# Altium PCB front_flex.PcbDoc (part 2 of 2)
Units mil, origin at the board's own origin, x right, y up, seen from the top; angles counter-clockwise.
Board outline 5591.04 x 1020.3 mil, 4 copper layers (Layer 1 (Top Layer), Layer 2 (PWR), Layer 3 (GND), Layer 4 (Bottom Layer)), stack 21.036 mil thick; 26 components, 44 nets, 150 pads, 87 vias.
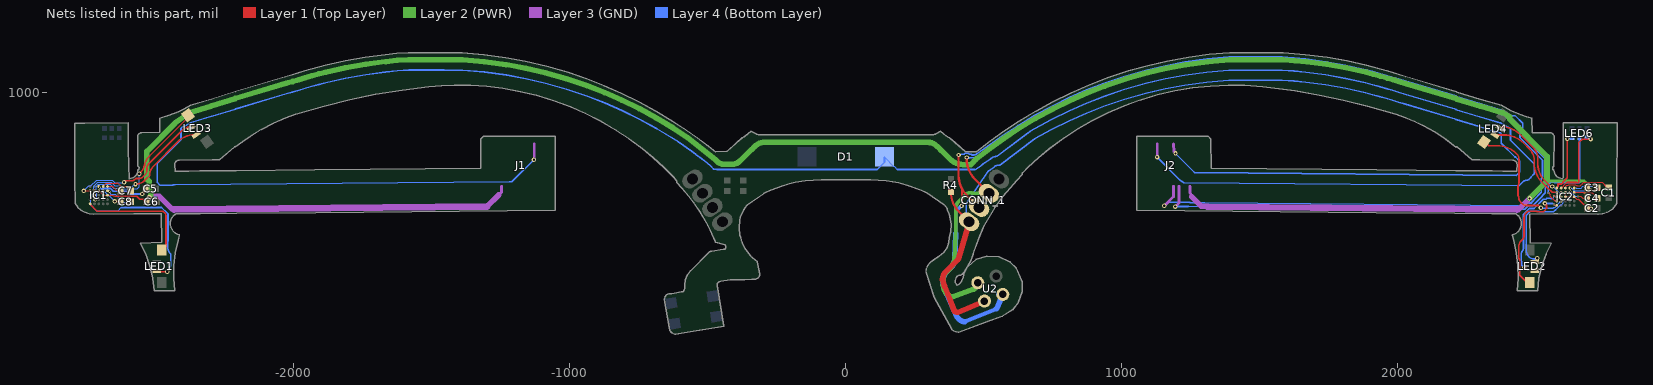
[diagram p4: the nets of this part, all layers, seen from the top]

## Via types
v1: diameter 16, hole 8, Layer 1 (Top Layer) to Layer 4 (Bottom Layer), tented both sides, 43 vias
v2: diameter 8, hole 4, Layer 1 (Top Layer) to Layer 4 (Bottom Layer), tented both sides, 19 vias
v3: diameter 16, hole 8, Layer 3 (GND) to Layer 4 (Bottom Layer), tented both sides, 17 vias
v4: diameter 24, hole 12, Layer 1 (Top Layer) to Layer 4 (Bottom Layer), tented both sides, 3 vias
v5: diameter 20, hole 10, Layer 1 (Top Layer) to Layer 4 (Bottom Layer), tented both sides, 2 vias
v6: diameter 18, hole 8, Layer 1 (Top Layer) to Layer 4 (Bottom Layer), tented both sides, 1 vias
v7: diameter 12, hole 6, Layer 1 (Top Layer) to Layer 4 (Bottom Layer), tented both sides, 1 vias
v8: diameter 24, hole 12, Layer 3 (GND) to Layer 4 (Bottom Layer), tented both sides, 1 vias

## Nets (pads, with @x,y where several pads share a name; then routed paths per layer and width w, separated by ;. In a path a pad name is that pad's centre, name@x,y a point inside that pad or via, vN(x,y) a via of type N, cw(c..) or ccw(c..) an arc to the next point about the centre after c; other vN are vias at no path point) (continued)
LED_LEFT_SIDE_G: IC1.C2 LED1.3 | length 593.7
  Layer 1 (Top Layer) w6: LED1.3@-2493.64,351.14 -2493.49,351.29 v1(-2458.5,351.29)
  Layer 4 (Bottom Layer) w4: v2(-2725.33,626.06) -2727.3,626.06 -2736.83,616.52 -2736.83,594.35 -2715.78,573.3 -2637.09,573.3 -2626.09,584.3
  Layer 4 (Bottom Layer) w6: -2626.09,584.3 -2479.49,584.3 -2461.09,565.89 -2461.09,565.68 -2456.36,560.95 -2456.36,462.57 ; v1(-2458.5,351.29) -2458.2,351.29 -2450.65,358.84 -2450.65,364.12 ccw(c-2452.71,364.12) -2451.26,365.58 ; -2456.99,462.48 -2456.99,440.91 ccw(c-2420.89,440.91) -2446.42,415.39 -2446.42,372.26 -2452.09,366.59
LED_LEFT_SIDE_R: IC1.E1 LED1.1 | length 426.4
  Layer 1 (Top Layer) w4: LED1.1@-2475.93,425.94 LED1.1@-2463.79,438.07
  Layer 1 (Top Layer) w6: IC1.E1@-2738.33,597.3 -2738.33,595.33 -2713.3,570.3 -2479.69,570.3 cw(c-2479.69,553.94) -2468.12,565.51 cw(c-2480.28,553.35) -2463.09,553.35 LED1.1@-2463.09,441.49
LED_LEFT_TOP_B: IC1.B1 LED3.4 | length 530.4
  Layer 1 (Top Layer) w4: v1@-2759.84,644.55 IC1.B1@-2738.33,644.56
  Layer 1 (Top Layer) w6: v1(-2761.09,644.3) -2760.09,644.3 v1@-2759.84,644.55 ; v1@-2615.3,674.53 -2615.53,674.3 -2615.99,674.3 -2608.69,681.59 -2583.23,681.59 -2580.82,684 -2578.86,684 -2573.56,689.3 -2561.12,689.3 ccw(c-2561.12,708.24) -2547.73,694.84 -2539.43,703.15 ccw(c-2556.66,720.38) -2532.29,720.38 -2532.29,723.78 ; -2532.84,723.78 cw(c-2502.72,723.78) -2524.02,745.08 -2406.68,862.42 cw(c-2369.72,825.46) LED3.4@-2369.72,877.73
  Layer 4 (Bottom Layer) w4: v1(-2761.09,644.3) -2742.92,662.47 -2735.95,662.47 -2714.86,683.56 -2659.01,683.56 -2649.75,674.3 v1@-2615.3,674.3
  other v1: -2615.3,675.83
LED_LEFT_TOP_G: IC1.B2 LED3.3 | length 466.4
  Layer 1 (Top Layer) w6: v1(-2574,669) ccw(c-2574,716.7) -2540.27,682.97 -2522.84,700.4 cw(c-2475.06,700.4) -2508.87,734.16 -2420.33,822.71 cw(c-2358.95,761.34) LED3.3@-2358.95,848.13
  Layer 4 (Bottom Layer) w4: v2(-2725.33,647.3) -2725.33,661.78 -2711.55,675.56 -2662.33,675.56 -2649.56,662.8 -2629.36,662.8 -2627.1,660.53 -2585.07,660.53 v1@-2580.3,665.3
LED_LEFT_TOP_R: IC1.D2 LED3.1 | length 567
  Layer 1 (Top Layer) w4: v1@-2563.05,703.59 v1(-2560.3,706.3)
  Layer 1 (Top Layer) w6: v1(-2560.3,706.3) -2554.28,712.37 ccw(c-2586.69,744.77) -2540.85,744.77 cw(c-2462.6,710.62) -2522.98,770.99 -2370.61,923.36 cw(c-2367.89,920.64) LED3.1@-2367.89,924.48
  Layer 4 (Bottom Layer) w4: v2(-2719.84,610.32) -2714.43,615.73 -2714.43,633.5 -2716.09,635.15 -2716.09,642.4 -2715.33,643.16 -2715.33,651.44 -2716.09,652.2 -2716.09,659.7 -2708.23,667.56 -2665.64,667.56 -2652.88,654.8 -2632.68,654.8 -2630.41,652.53 -2567.2,652.53 -2560,659.73 -2560,702.47 v1@-2560.22,702.69
  Layer 4 (Bottom Layer) w10: v1(-2560.3,706.3) -2560.3,704.62 ccw(c-2538.63,704.62) v1@-2560.22,702.69
LED_RIGHT_FRONT_B: IC2.A1 LED6.3 | length 220.4
  Layer 1 (Top Layer) w6: IC2.A1@2577.14,654.79 2577.12,654.92 2581.7,659.49 2581.7,669.52 2594.86,669.52 2601.11,675.77 2601.11,677.19 2615.48,691.56 v1(2615.48,833.36)
  Layer 4 (Bottom Layer) w6: v1(2615.48,833.36) 2630.56,833.36 ccw(c2630.56,837.33) LED6.3@2633.37,834.52
LED_RIGHT_FRONT_G: IC2.A2 LED6.1 | length 270.4
  Layer 1 (Top Layer) w4: IC2.A2@2592.89,654.79 2611.11,673.04
  Layer 1 (Top Layer) w6: 2611.11,673.04 2612.86,674.79 2648.42,674.79 2649.16,674.05 2656.62,674.05 2656.62,819.59 2669,831.97 v1(2699.81,831.97)
  Layer 4 (Bottom Layer) w4: v1@2695.58,831.97 v1(2699.81,831.97)
LED_RIGHT_FRONT_R: IC2.D1 LED6.2 | length 355.9
  Layer 1 (Top Layer) w4: v2(2547.62,636.31) 2553.49,630.44 2553.49,625.24 2569.92,608.81 2574.16,608.81 cw(c2574.16,606.78) IC2.D1@2575.6,608.21
  Layer 4 (Bottom Layer) w6: v2(2547.62,636.31) 2545.95,637.98 2545.95,666.55 2554.74,675.33 2567.16,675.33 2568.99,673.51 2659.5,673.51 2659.5,807.23 2659.39,807.35 2659.39,830.5 cw(c2660.97,830.5) LED6.2@2659.41,830.76 ; LED6.2@2659.41,836.93 LED6.2@2659.41,830.76 ; LED6.2@2659.85,831.62 ccw(c2660.97,830.5) LED6.2@2659.41,830.76
LED_RIGHT_SIDE_B: IC2.C1 LED2.4 | length 392.7
  Layer 1 (Top Layer) w4: v2(2566.62,626.31) 2566.89,626.04 2573.76,626.04 2576.49,623.31 IC2.C1@2577.12,623.31
  Layer 1 (Top Layer) w6: v1(2458.21,366.86) 2459.8,366.86 2461.94,368.99 2472.36,358.57 2486.47,358.57 LED2.4@2491.47,353.57
  Layer 4 (Bottom Layer) w4: 2560.87,615.57 2565.37,620.06 2565.37,625.06 v2(2566.62,626.31)
  Layer 4 (Bottom Layer) w6: v1(2458.21,366.86) 2449.72,375.36 2449.72,388.19 2449.01,388.9 2449.01,418.26 cw(c2462.07,418.26) 2452.83,427.49 ccw(c2443.69,436.64) 2456.62,436.64 2456.62,559.54 2477.39,580.31 2494.36,580.31 2527.97,613.92 2538.01,613.92 2541.25,617.16 2554.5,617.16 2556.09,615.57 2560.87,615.57
LED_RIGHT_SIDE_G: IC2.C2 LED2.3 | length 361.7
  Layer 4 (Bottom Layer) w4: 2572.87,575.81 2572.87,576.19 2591.48,594.8 2594.29,594.8 2600.15,600.66 2600.15,604.8 ccw(c2590.15,604.8) 2597.22,611.87 2595.76,613.34 ccw(c2592.22,609.8) 2592.22,614.8 2591.77,614.8 2588.37,618.2 2588.37,618.98 v2@2589.95,620.55
  Layer 4 (Bottom Layer) w6: 2466.47,427.84 ccw(c2496.87,427.84) 2466.62,424.86 ; v1@2499.66,397.58 cw(c2496.87,427.84) 2466.62,424.86 ; 2572.87,575.81 2565.41,568.34 2513.45,568.34 2511.49,570.31 2481.54,570.31 2466.62,555.39 2466.62,424.86 ; v2@2589.95,620.55 v2(2590.15,620.55)
  other v1: 2506.47,400.36
LED_RIGHT_SIDE_R: IC2.E1 LED2.1 | length 427.5
  Layer 1 (Top Layer) w4: v1(2534.18,598.92) v1@2536.94,596.16 ; v2(2566.7,595.48) 2569.53,592.64 2576.29,592.64 IC2.E1@2577.12,591.81
  Layer 1 (Top Layer) w6: LED2.1@2473.75,312.23 2473.75,310.26 cw(c2473.75,315.97) 2469.72,311.93 2444.68,336.97 cw(c2448.72,341.01) 2443.01,341.01 2442.62,363.38 2442.62,391.94 ccw(c2431.46,391.94) 2439.57,399.61 2439.35,441.79 cw(c2471.06,441.79) 2448.64,464.22 2453.64,469.22 ccw(c2441.62,481.24) 2458.62,481.24 2458.62,548.93 cw(c2479.42,548.93) 2464.71,563.63 2467.64,566.56 cw(c2476.68,557.52) 2476.68,570.31 2504.76,570.31 2506.73,568.34 2528.2,568.34 2529.48,569.62 2541.93,582.07 2539.7,584.29 2539.7,593.4 v1@2536.94,596.16
  Layer 4 (Bottom Layer) w6: v1@2535.79,598.92 2562.72,598.92 2566.16,595.48 v2(2566.7,595.48)
LED_RIGHT_TOP_B: IC2.B1 LED4.4 | length 338.7
  Layer 1 (Top Layer) w4: IC2.B1@2576.29,639.89 IC2.B1@2577.14,639.04
  Layer 1 (Top Layer) w6: LED4.4@2357.5,847.14 2386.15,847.14 cw(c2386.15,747.14) 2456.86,817.85 2477.78,796.93 cw(c2435.03,754.18) 2495.49,754.18 2495.49,745.3 ccw(c2595.49,745.3) 2524.78,674.59 2544.87,654.49 2545.58,654.49 2560.18,639.89 IC2.B1@2576.29,639.89
LED_RIGHT_TOP_G: IC2.B2 LED4.3 | length 359.6
  Layer 1 (Top Layer) w6: LED4.3@2368.27,876.73 2374.95,876.73 cw(c2374.95,776.73) 2445.67,847.44 2460.74,832.37 2493.26,799.85 cw(c2455.72,762.36) 2508.77,762.36 2508.77,741.71 ccw(c2593.4,741.71) 2533.56,681.87 2547.09,668.34 cw(c2545.8,667.06) 2547.62,667.06 2554.35,660.33 v1(2560.95,660.33)
  Layer 4 (Bottom Layer) w4: v1(2560.95,660.33) 2563.1,660.33 2587.14,636.29 v2(2590.14,636.29) ; v2@2588.37,634.56 v2(2590.14,636.29)
LED_RIGHT_TOP_R: IC2.D2 LED4.1 | length 476.6
  Layer 1 (Top Layer) w4: v2(2590.15,604.8) 2590.15,605.83 2591.88,607.56 IC2.D2@2594.05,607.56
  Layer 1 (Top Layer) w6: LED4.1@2316.58,808.49 2319.26,811.17 2327.37,811.17 2330.09,808.45 2360.44,808.45 cw(c2360.44,708.45) 2431.16,779.17 2432.13,778.2 cw(c2412.97,759.04) 2440.06,759.04 2440.06,672.71 cw(c2428.76,672.71) 2436.75,664.72 ; 2436.8,664.15 2436.75,664.11 2436.75,658.99 2436.75,653.87 2436.75,627.59 ccw(c2443.49,627.59) 2438.72,622.82 ccw(c2467.97,622.82) 2447.29,602.15 2448.83,600.61 ccw(c2471.36,623.14) 2471.36,591.27 2511.15,591.27 2519.09,583.34 v1(2519.67,583.34)
  Layer 4 (Bottom Layer) w4: 2568.12,583.81 2569.79,585.48 2570.84,585.48 v2(2590.15,604.8)
  Layer 4 (Bottom Layer) w6: v1@2512.96,583.4 2515.05,581.31 2563.37,581.31 2565.37,583.31
LH_DIODE_ARRAY: D1.1 J1.14 J2.13 | length 8456.1
  Layer 3 (GND) w10: v3(-1129.82,757.59) -1128.83,758.58 J1.14@-1128.83,814.72 ; v3(1128.78,766.97) v3(1128.78,766.97) J2.13@1128.82,814.72
  Layer 4 (Bottom Layer) w4: D1.1@140.75,767.67 140.75,766.68 173.2,734.23 175.14,734.23 187.76,721.61
  Layer 4 (Bottom Layer) w6: -2297.73,914.37 -2298.01,914.29 -2375.27,891.33 -2393.36,880.85 -2404.52,875.15 -2409.09,870.59 -2409.09,829.5 -2494.88,743.71 -2494.88,675.31 -2489.03,669.46 -2484.87,665.3 -2471.45,665.3 -2470.77,664.61 -2438.9,664.61 -2437.39,666.12 -2429.34,666.12 -1219.46,677.21 -1210.2,677.21 v3(-1129.82,757.59) ; -2296.29,914.47 -2212.03,939.84 -2212.05,941.31 -2027.38,995.99 -2004.16,1002.86 -1981.48,1009.58 -1958.79,1016.3 -1934.04,1023.43 -1909.34,1030.15 -1884.54,1036.49 -1812.46,1052.67 -1739.75,1065.65 -1667.03,1075.33 -1624.87,1079.45 -1582.61,1082.47 -1520.87,1082.42 -1454.76,1082.33 -1388.64,1082.2 -1308.84,1075.29 -1229.5,1064.41 -1158.68,1051.25 -1088.65,1034.93 -1011.52,1013.06 -935.43,987.32 -872.62,962.82 -810.87,935.68 -747.3,904.45 -685.15,870.5 -624.51,833.9 -606.54,822.34 -557.94,787.64 -543.31,777.18 ; -542.1,775.97 -528.83,765.98 -502.71,746.45 -487.99,733.43 -479.05,723.73 -466.57,721.83 113.94,721.83 140.75,748.63 D1.1@140.75,766.68 ; 187.76,721.61 468.24,721.61 488.1,734.15 498.32,742.03 521.39,756.89 523.73,759.23 cw(c548.44,734.53) 548.44,769.46 632.61,833.1 654.16,849.06 661.7,854.66 667.81,859.74 684.89,869.72 747.04,903.68 810.61,934.91 872.36,962.04 935.17,986.55 1011.26,1012.28 1088.39,1034.16 1158.42,1050.47 1229.24,1063.63 1308.58,1074.51 1388.38,1081.42 1454.5,1081.56 1520.61,1081.64 1582.35,1081.69 1624.61,1078.67 1666.77,1074.56 1739.49,1064.88 1812.2,1051.89 1884.28,1035.71 1909.08,1029.37 1933.78,1022.66 1958.53,1015.53 1981.22,1008.81 2003.91,1002.08 2027.12,995.21 2211.79,940.53 2211.77,939.06 2296.03,913.69 ; v3(1128.78,766.97) 1128.78,766.06 1212.6,682.24 1225.25,673.65 2434.59,662.56 ; 2296.26,913.39 2296.55,913.3 2373.8,890.34 ; 2375.8,889.34 2393.89,878.86 2405.06,873.16 2409.62,868.6 2409.62,827.52 2495.38,741.76 2495.38,706.16 2484.04,694.83 cw(c2478.31,696.59) 2482.52,692.32 2477.58,687.37 cw(c2465.39,699.59) 2465.39,682.33 ccw(c2465.39,668.63) 2455.7,678.32 2443.72,666.34 cw(c2434.59,675.48) 2434.85,662.56 ; 2434.59,662.56 ccw(c2434.59,675.48) 2434.85,662.56 ; 2434.59,662.56 2434.85,662.56
NetC3_1: C3.1 IC2.A5 | length 84.6
  Layer 1 (Top Layer) w4: v2@2713.51,660.9 2720.15,660.9 C3.1@2724.88,656.17
  Layer 4 (Bottom Layer) w4: v2(2644.86,654.52) 2665.68,654.52 2672.05,660.9 v2(2710.51,660.9) v2@2713.51,660.9
NetC3_2: C3.2 IC2.A4 | length 95.2
  Layer 1 (Top Layer) w4: C3.2@2687.08,656.17 2694.83,648.42 v2(2700.37,648.42)
  Layer 4 (Bottom Layer) w4: v2(2627.13,653.79) 2630.54,653.79 2639.87,644.46 2680.77,644.46 2684.73,648.42 v2(2700.37,648.42)
NetC4_1: C4.1 IC2.B5 | length 93
  Layer 1 (Top Layer) w4: IC2.B5@2640.13,639.04 2673.06,639.06 2673.76,638.35 2705.69,638.35 C4.1@2724.88,619.17
NetC4_2: C4.2 IC2.B4 | length 70.9
  Layer 1 (Top Layer) w4: v2(2653.62,624.31) 2664.72,624.31 2670.72,618.31 2686.23,618.31 C4.2@2687.08,619.17
  Layer 4 (Bottom Layer) w4: v2(2627.13,641.79) 2628.14,641.79 2646.62,623.31 2647.62,624.31 v2(2653.62,624.31)
NetC7_1: C7.1 IC1.A5 | length 51.6
  Layer 1 (Top Layer) w4: IC1.A5@-2675.34,660.3 -2660.26,660.3 cw(c-2660.26,651.14) -2653.79,657.63 ; -2653.78,657.62 -2648.03,651.87 ccw(c-2628.98,670.92) C7.1@-2628.98,643.98
NetC7_2: C7.2 IC1.A4 | length 117.5
  Layer 1 (Top Layer) w4: IC1.A4@-2691.09,660.3 -2679.09,672.3 -2642.45,672.3 cw(c-2642.45,662.52) -2635.54,669.43 ccw(c-2614.05,690.92) -2622.7,661.79 -2615.41,661.79 -2615.2,661.58 -2612.05,661.58 -2611.98,661.5 -2601.89,661.5 -2593.5,653.11 C7.2@-2585.22,653.11
NetC8_1: C8.1 IC1.B5 | length 129.7
  Layer 1 (Top Layer) w4: v1(-2598.13,602.5) -2582.19,602.5 -2591.09,611.4 -2587.19,615.3 C8.1@-2582.68,610.79
  Layer 4 (Bottom Layer) w4: v2(-2667.9,641.54) -2667.9,637.11 -2663.09,632.3 -2646.89,632.3 -2616.15,601.56 -2615.2,602.5 v1(-2598.13,602.5)
NetC8_2: C8.2 IC1.B4 | length 76.9
  Layer 1 (Top Layer) w4: v1(-2649.09,606.3) C8.2@-2628.98,606.3
  Layer 4 (Bottom Layer) w4: v2(-2688.34,641.81) -2688.34,641.55 -2687.32,640.53 -2687.32,642.39 -2676.23,631.3 -2674.09,631.3 v1(-2649.09,606.3)
TP_NOSE: CONN_1.3 J2.8 U2.4 | length 4657.5
  Layer 1 (Top Layer) w8: v1(438.59,765.51) 438.59,757.95 ccw(c538.59,757.95) 467.88,687.24 CONN_1.3@519.31,635.82
  Layer 3 (GND) w10: v3(1154.84,590.24) 1154.84,590.45 1187.87,623.48 J2.8@1187.87,661.18
  Layer 2 (PWR) w13: 398.06,486.21 398.75,486.9 398.75,582.64 cw(c427.55,582.64) 407.18,603 434.04,629.86 cw(c454.43,609.51) 454.43,638.31 ccw(c460.46,644.35) 460.46,635.82 CONN_1.3@519.31,635.82 ; 399.16,521.14 399.44,520.86
  Layer 2 (PWR) w16: 395.49,402.02 398.06,486.21
  Layer 2 (PWR) w20: 395.49,402.02 cw(c346.5,402.19) 381.14,367.54 363.16,349.56 ccw(c387.96,324.77) 352.89,324.77 352.89,307.79 ccw(c408.12,307.79) 369.07,268.74 372.13,265.67 ccw(c386.16,279.71) 386.16,259.86 463.83,288.51 465.89,289.27 468.53,291.91 U2.4@478.7,311.45
  Layer 4 (Bottom Layer) w6: 446.72,762.29 441.53,762.29 cw(c445.6,758.23) 445.6,763.97 465.14,763.97 ccw(c465.14,789.22) 482.99,771.37 612.57,861.42 618,864.93 619.5,865.93 624.25,869.12 684.89,905.72 747.04,939.68 810.61,970.91 872.36,998.04 935.17,1022.55 1011.26,1048.28 1088.39,1070.16 1158.42,1086.47 1229.24,1099.63 1308.58,1110.51 1388.38,1117.42 1454.5,1117.56 1520.61,1117.64 1582.35,1117.69 1624.61,1114.67 1666.77,1110.56 1739.49,1100.88 1812.2,1087.89 1884.28,1071.71 1909.08,1065.37 1933.78,1058.66 1958.53,1051.53 1981.22,1044.81 2003.91,1038.08 2027.12,1031.21 2211.79,976.53 2211.77,975.06 2296.03,949.69 ; v3(1154.84,590.24) 1167.93,603.33 1246.67,603.33 1248.43,601.56 1300.44,601.56 2455.35,591.12 2460.02,591.22 2469.11,600.31 2485.52,600.31 2485.92,600.7 2485.92,603.32 2493.6,611.01 2493.6,611.41 2521.28,639.08 2521.28,689.1 2525.38,693.2 2525.38,755.7 2443.62,837.45 2443.62,879.45 2419.72,903.35 2416.68,903.35 2415.09,904.93 2414.25,904.93 2412.08,907.1 ; 2292.89,951.26 2370.14,928.3 ; 2372.14,927.3 2390.24,916.83 2408.88,907.31 ; 2409.08,907.35 2411.75,906.27
TP_NOSE_GND: CONN_1.2 J2.6 U2.2 | length 4836.5
  Layer 1 (Top Layer) w8: v1(409.35,774.53) 409.35,699.47 ccw(c509.35,699.47) 421.27,652.12 ; v1(420,590) ccw(c416.94,593.06) 421.27,593.06 421.27,652.12 ; CONN_1.2@483.18,584.21 438.64,628.76 cw(c509.35,699.47) 421.27,652.12
  Layer 3 (GND) w10: v3(1194.58,587.58) 1207.56,600.56 J2.6@1207.56,661.18
  Layer 4 (Bottom Layer) w6: 418.26,777.29 429.16,777.29 432.38,780.51 444.81,780.51 448.02,777.29 454.93,777.29 457.6,774.61 466.22,774.61 ccw(c466.22,787.61) 475.41,778.42 571.2,846.08 624.25,881.12 684.89,917.72 747.04,951.68 810.61,982.91 872.36,1010.04 935.17,1034.55 1011.26,1060.28 1088.39,1082.16 1158.42,1098.47 1229.24,1111.63 1308.58,1122.51 1388.38,1129.42 1454.5,1129.56 1520.61,1129.64 1582.35,1129.69 1624.61,1126.67 1666.77,1122.56 1739.49,1112.88 1812.2,1099.89 1884.28,1083.71 1909.08,1077.37 1933.78,1070.66 1958.53,1063.53 1981.22,1056.81 2003.91,1050.08 2027.12,1043.21 2211.79,988.53 2211.77,987.06 2296.03,961.69 ; v3(1194.58,587.58) 1240.84,587.58 1242.54,589.28 2435.87,578.34 2461.28,578.34 2473.25,590.31 2489.66,590.31 2524.71,625.36 2524.71,627.08 2534.87,637.24 2534.87,689.09 2535.38,689.59 2535.38,759.84 2453.62,841.59 2453.62,889.31 2425.62,917.31 2412.57,917.31 2412.53,917.35 2393.89,926.86 2375.8,937.34 ; 2296.26,961.39 2296.55,961.3 2373.8,938.34
  Layer 4 (Bottom Layer) w13: 398.75,489.01 398.75,568.75 v1(420,590)
  Layer 4 (Bottom Layer) w16: 431.66,170.53 545.7,216.65
  Layer 4 (Bottom Layer) w20: 398.75,489.01 396.08,401.59 cw(c345.83,401.59) 381.36,366.06 363.38,348.08 ccw(c388.18,323.29) 353.11,323.29 353.11,306.31 366.44,270.48 366.51,270.31 403.71,186.62 404.49,185.84 411.41,178.92 ccw(c431.66,199.16) 431.66,170.53 ; 545.7,216.65 547.37,218.33 547.83,219.38 U2.2@569.33,269.18 U2.2@554.75,269.18
TP_THERMISTOR: CONN_1.1 J2.7 R4.1 U2.3 | length 4268.7
  Layer 1 (Top Layer) w6: R4.1@381.34,639.75 R4.1@381.34,641.08 ; CONN_1.1@447.05,532.61 CONN_1.1@448.32,530.19
  Layer 1 (Top Layer) w8: R4.1@381.34,639.75 ccw(c481.34,639.75) 410.62,569.04 CONN_1.1@447.05,532.61
  Layer 1 (Top Layer) w20: 358.92,295.6 cw(c391.84,295.6) 358.95,296.92 ; CONN_1.1@448.32,530.19 409.86,400.79 cw(c409.36,400.79) 409.82,400.6 cw(c392.05,407.98) 405.66,394.38 377.32,366.04 362.92,351.63 ccw(c392.21,322.34) 350.8,323.4 ccw(c356.79,323.24) 351.08,321.41 358.95,296.92 ; U2.3@500.06,244.05 406.65,204 401.77,204 396.6,206.16 393.16,209.61 359.39,295.78 358.95,296.92
  Layer 3 (GND) w10: J2.7@1187.87,814.72 1189.49,785.87
  Layer 4 (Bottom Layer) w6: CONN_1.1@436.54,520.22 436.54,600.66 ; 436.59,599.27 516.87,716.21 537.57,730.57 cw(c555.12,713.02) 555.12,737.84 558.28,737.84 684.89,833.72 747.04,867.68 810.61,898.91 872.36,926.04 935.17,950.55 1011.26,976.28 1088.39,998.16 1158.42,1014.47 1229.24,1027.63 1308.58,1038.51 1388.38,1045.42 1454.5,1045.56 1520.61,1045.64 1582.35,1045.69 1624.61,1042.67 1666.77,1038.56 1739.49,1028.88 1812.2,1015.89 1884.28,999.71 1909.08,993.37 1933.78,986.66 1958.53,979.53 1981.22,972.81 2003.91,966.08 2027.12,959.21 2211.79,904.53 2211.77,903.06 2296.03,877.69 ; v3(1195.18,780.18) 1264.42,710.94 2430.56,700.25 2443.4,713.09 2443.4,751.31 2427.4,767.31 2425.92,767.31 2375.8,817.43 2375.8,851.85 ; 2296.26,877.39 2296.55,877.3 2373.8,854.34
VBAT: C2.2 C6.2 IC1.B3 IC1.C4 IC1.C5 IC2.B3 IC2.C3 IC2.C4 IC2.C5 J1.1 J2.2 | length 9040
  Layer 1 (Top Layer) w4: IC1.B3@-2707.32,644.38 -2691.57,628.63 -2691.09,628.8 -2659.85,628.8 ; IC2.B3@2608.64,639.04 2608.64,623.31 2624.38,623.31 IC2.C5@2640.12,623.31 ; IC2.C5@2640.17,623.31 2650.17,613.31 2657.32,613.31
  Layer 1 (Top Layer) w6: -2659.85,628.8 -2648.1,624.55 -2583.49,624.44 -2569.37,624.93 -2558.55,614.11 -2545.99,614.11 -2537.99,606.11 C6.2@-2537.99,605.73 ; C6.2@-2537.99,605.3 C6.2@-2537.99,605.73 ; v5@-2524.56,619.15 C6.2@-2537.99,605.73 ; IC2.C5@2640.12,623.31 IC2.C5@2640.17,623.31 ; 2657.32,613.31 C2.2@2687.08,583.55 ; C2.2@2687.08,583.17 C2.2@2696.76,583.17
  Layer 3 (GND) w10: -1257.1,630.31 -1247.85,639.56 -1247.85,660.28 J1.1@-1246.94,661.18 ; J2.2@1246.93,661.18 1247.83,660.28 1247.83,636.65 1250.99,633.5 1250.99,626.13 1253.51,623.61
  Layer 3 (GND) w20: v5@-2519.9,625.74 -2488.41,625.74 -2439.68,577.01 -2433.96,577.01 -2428.24,577.01 ; -1299.82,588.01 -1299.4,588.01 -1257.1,630.31 ; 1253.51,623.61 1287.79,589.33 1310.85,589.33 ; 2432.1,575.88 2437.27,575.88 v1(2478.6,617.22)
  Layer 3 (GND) w25: -2433.96,577.01 -1299.82,588.01 ; 1310.85,587.06 2432.85,576.77
  Layer 2 (PWR) w10: 2541.72,680.34 2676.45,680.34 2682.31,674.48 2682.31,602.02 2701.62,582.71 v1(2701.62,580.31)
  Layer 2 (PWR) w20: v5@-2518.26,625.46 -2518.26,640.07 -2524.79,646.6 -2524.79,679.43 -2532.63,687.27 -2532.63,787.84 -2429.75,890.72 -2378.1,927.91 -2300.85,950.87 -2300.56,950.96 ; -2296.81,952.41 -2212.55,977.78 -2212.57,979.25 -2027.9,1033.93 -2004.69,1040.81 -1982,1047.53 -1959.31,1054.25 -1934.56,1061.38 -1909.86,1068.09 -1885.06,1074.44 -1812.98,1090.62 -1740.27,1103.6 -1667.55,1113.28 -1625.39,1117.39 -1583.13,1120.41 -1521.39,1120.37 -1455.28,1120.28 -1389.16,1120.15 -1309.36,1113.24 -1230.02,1102.35 -1159.2,1089.19 -1089.17,1072.88 -1012.04,1051 -935.95,1025.27 -873.14,1000.76 -811.39,973.63 -747.82,942.4 -685.67,908.44 -625.03,871.84 -571.98,836.8 -471.95,757.41 -464.6,750.07 ccw(c-441.83,772.85) -441.83,740.64 -413.34,740.75 ccw(c-413.34,784.25) -382.61,753.46 ; -382.58,753.49 -342.82,793.25 -341.75,793.25 -330.34,804.66 cw(c-292.51,766.84) -292.51,820.33 297.84,820.33 cw(c297.84,774.62) 330.16,806.94 344.64,792.46 345.71,792.46 378.72,759.45 ; 378.74,759.43 ccw(c425.78,806.5) 425.78,739.96 453.34,739.96 466.23,752.85 466.23,753.82 472.35,759.95 473.08,759.95 523.26,798.97 574.87,836.01 627.92,871.05 688.56,907.65 750.71,941.61 814.28,972.84 876.03,999.97 938.84,1024.48 1014.93,1050.21 1092.06,1072.09 1162.09,1088.4 1232.91,1101.56 1312.25,1112.45 1392.05,1119.36 1458.17,1119.49 1524.28,1119.57 1586.02,1119.62 1628.28,1116.6 1670.44,1112.49 1743.16,1102.81 1815.87,1089.82 1887.95,1073.65 1912.75,1067.3 1937.45,1060.59 1962.2,1053.46 1984.89,1046.74 2007.58,1040.02 2030.79,1033.14 2215.46,978.46 2215.44,976.99 2299.7,951.62 ; 2302.15,951.04 2302.44,950.95 2379.69,927.99 2397.78,917.51 2407.1,912.76 2407.1,903.97 2541.72,769.35 2541.72,680.34 v1(2478.6,617.22)
  other v5: -2524.53,618.86
VOUT_L_LED: C5.2 IC1.A3 | length 189.3
  Layer 1 (Top Layer) w6: v1(-2549.13,633.17) -2549.13,633.29 -2541.9,640.51 cw(c-2526.46,640.51) C5.2@-2537.38,651.43
  Layer 4 (Bottom Layer) w4: v2(-2704.09,657.56) -2697.83,651.3
  Layer 4 (Bottom Layer) w6: -2697.83,651.3 -2694.41,651.3 -2692.9,652.81 -2663.62,652.81 -2654.34,643.53 -2605.73,643.53 -2594.8,632.6 -2594.23,633.17 v1(-2549.13,633.17)
VOUT_R_LED: C1.2 IC2.A3 | length 175.2
  Layer 1 (Top Layer) w4: IC2.A3@2608.62,654.55 IC2.A3@2608.87,654.81 ; IC2.A3@2608.64,654.79 2609.8,654.81 2611.97,656.98 2611.97,662.59 2613.42,664.04 2618.08,664.04 2619.83,665.79 2644.69,665.79 2645.96,664.52 2649,664.52 2650.21,663.31 2662.42,663.31 2664.15,665.04 2664.66,665.04 2666.03,666.41 2668.75,669.13 2670.11,670.49 2670.11,670.6 2675.04,675.53 2741.52,675.53 2751.17,665.87 2751.17,665.06 2760.17,656.06 C1.2@2760.98,656.06
pads on no net: IC1.D3 IC1.E2 IC2.D3 IC2.E2 J1.3 J2.1 J2.4 J2.5

## Polygon pours and split planes (outlines as drawn)
GND on Layer 3 (GND) "GND-No Net 1" (hatched 45Degree grid 19.68 track 9.84, remove dead copper, pour order 18): 579 vertices, not listed, extent -2833.81,33.5 2833.84,1149.04
GND on Layer 3 (GND) "GND-No Net 2" (hatched 45Degree grid 20 track 8, remove dead copper, pour order 17): 2429.09,707.09 2429.09,570.77 1070.97,584.2 1070.97,828.17 1311.43,828.17 1311.43,717.33
GND on Layer 3 (GND) "GND-No Net 3" (hatched 45Degree grid 20 track 8, remove dead copper, pour order 15): -2428.88,707.11 -2428.88,570.78 -1070.76,584.21 -1070.76,828.18 -1311.21,828.19 -1311.21,717.34

## Keep-outs
Keep-Out Layer:
  lines w2: 556.62,769.02 cw(c556.62,764) 559.33,768.23 ; 617.63,675.94 617.67,675.98 617.63,675.94 ; 617.63,675.94 617.59,675.89 617.63,675.94 ; 636.74,696.82 636.76,696.84 636.74,696.82
  lines w3.94: -2428.76,715.67 -2424.82,715.71 -2380.81,716.14 -2341.51,716.5 -2209.43,717.72 -1923.84,720.31 -1323.01,726.93 -1322.62,728.31 -1322.62,832.13 -1311.87,842.87 -1053.37,843.15 -1053.37,573.35 -1920.92,565.39 -2206.48,562.76 -2340.1,561.53 -2379.43,561.18 -2423.37,560.78 -2427.3,560.75 ; -2428.76,715.67 -2428.76,715.67 ; -2428.76,715.67 -2430.53,716.1 -2431.87,739.96 -2431.51,743.23 -2430.45,746.61 -2428.6,749.65 -2426.16,752.16 -2423.17,754.09 -2419.86,755.28 -2416.24,755.67 -2296.4,756.81 -2269,757.05 -2214.66,803.62 -2213.05,804.25 -2211.91,803.98 -2185.96,822.4 -2157.7,842.48 -2118.8,866.61 -2074.59,889.65 -2028.48,909.25 -1993.48,921.42 -1889.86,951.57 -1797.22,974.49 -1703.72,993.82 -1607.5,1009.72 -1510.77,1021.69 -1464.86,1025.47 -1418.8,1027.24 -1359.78,1026.69 -1300.88,1022.83 -1242.38,1015.79 -1178.37,1004.25 -1121,990.39 -1058.29,971.38 -997.14,948.62 -943.25,924.92 -890.45,898.15 -833.8,865.12 -784.27,832.28 -736.79,796.85 -697.42,764.25 -659.59,729.8 -623.44,693.58 -611.96,680.4 -612.23,674.7 -594.48,654.35 -569.95,626.2 -551.37,602.58 -529.04,570.45 -499.12,518.64 -485.26,489.11 -473.45,460.33 -473.3,459.87 -473.05,459.46 -472.71,459.1 -472.31,458.84 -437.27,448.64 -435.85,446.56 -434.93,444.21 -434.56,441.72 -434.77,439.2 -435.54,436.8 -436.82,434.63 -438.57,432.81 -444.04,432.81 -484.95,425.88 -487.69,425.63 -490.33,424.83 -492.75,423.52 -494.87,421.75 -562.55,354.07 -574.17,338.92 -581.49,321.28 -584,302.34 -584,289.35 -584.27,286.95 -585.06,284.66 -586.35,282.61 -588.06,280.9 -590.1,279.62 -592.39,278.82 -594.79,278.56 -630.97,272.46 -636.21,272.46 -640.82,271.94 -645.19,270.41 -649.12,267.94 -652.4,264.66 -654.87,260.74 -656.4,256.36 -656.92,251.75 -655.54,240.21 -640.14,149.11 -637.66,138.01 -630.22,130.53 -626.33,127.56 -621.81,125.69 -616.96,125.06 -574.71,131.87 -441.25,154.43 -466.09,301.36 -466.09,303.32 -465.77,306.2 -464.81,308.93 -463.28,311.38 -461.23,313.42 -458.78,314.96 -456.05,315.92 -453.18,316.24 -442.03,318.13 -417.27,322.3 -366.01,323.05 -339.63,323.29 -331.6,323.29 -327.12,323.79 -322.86,325.28 -319.03,327.68 -315.84,330.88 -313.44,334.7 -311.95,338.96 -311.44,343.44 -319.95,387.1 -338.61,402.73 -344.48,408.36 -357.27,424.51 -365.22,437.69 -370.66,447.46 -374.16,456.24 -377.62,465.53 -380.66,475.69 -383.33,484.55 -384.63,493.44 -385.74,500.96 -385.93,511.08 -385.93,519.7 -384.63,528.48 -383.18,537.97 -381.56,548.64 -381.56,550.11 -379.11,557.79 -369.86,575.98 -357.54,592.91 -355.77,594.29 -296.32,635.16 -288.6,638.98 -272.77,646.26 -226.63,663.66 -204.74,670 -182.46,675.27 -146.04,681.38 -88.84,685 89.82,685 146.95,681.42 169.94,677.91 192.46,673.31 227.58,663.74 273.8,646.34 289.71,638.98 297.15,635.35 356.95,594.29 358.09,593.5 367.72,580.97 367.69,578.1 367.8,577.01 368.16,575.98 375.48,560.35 383.2,523.85 381.27,495.74 375.68,476.37 375.48,475.51 373.48,456.92 367.89,439.91 355.6,421.53 337.69,407.59 319.11,394.32 306.7,385.43 306.07,384.91 305.84,384.68 297.82,374.23 292.78,362.07 291.07,349.01 291.31,347.43 320.44,258.06 320.84,257.16 384.03,143.1 384.89,141.96 391.74,136.7 399.72,133.4 408.28,132.28 410.01,132.59 521.51,173.62 567.33,190.31 568.24,190.7 604.93,212.99 605.4,213.62 605.48,213.73 605.52,213.73 624.85,238.34 625.64,239.76 639.58,279.21 639.85,280.82 640.21,312.55 640.12,313.6 639.81,314.6 618.99,362.95 618.56,363.77 617.96,364.48 595.8,387.16 594.3,388.22 556.23,405.94 555.32,406.29 554.34,406.41 512.37,408.22 511.52,408.22 510.68,408.02 474.5,397.08 473.54,396.68 472.69,396.1 442.77,370.7 441.59,369.28 428.32,345.27 427.85,344.09 427.69,342.83 426.03,330.3 421.2,318.62 413.52,308.58 410.44,306.09 406.93,304.28 403.12,303.22 399.89,307.45 397.85,312.36 397.14,317.63 397.99,323.99 400.45,329.93 404.34,335.03 406.57,336.74 409.16,337.82 411.94,338.18 415.56,338.57 419.01,339.74 422.12,341.62 424.76,344.13 426.78,347.16 454.5,393.34 455.01,394.48 461.51,415.86 481.59,471.25 498.99,510.98 508.52,529.17 541.03,584.56 569.5,623.5 597.37,655.51 620.21,681.69 639.3,702.55 640.03,703.57 640.48,704.74 640.64,705.98 640.64,709.61 660.69,729.68 698.48,764.17 737.86,796.81 788.49,834.41 841.4,869.13 892.66,898.7 951.08,928.07 1010.89,953.66 1066.36,973.7 1129.04,992.28 1192.23,1006.89 1256.67,1017.68 1321.67,1024.49 1387.03,1027.36 1446.16,1026.5 1511.75,1021.73 1570.18,1015 1628.37,1006.81 1715.77,991.77 1803.72,973.31 1890.81,951.65 1994.43,921.46 2029.47,909.33 2061.87,895.98 2093.37,880.98 2133.37,858.66 2174.86,831.34 2211.87,802.6 2214.19,804.25 2215.34,803.98 2270.18,757.05 2297.58,756.81 2417.19,755.71 2420.41,755.39 2423.8,754.33 2426.87,752.52 2429.43,750.08 2431.36,747.13 2432.58,743.82 2433.01,740.24 2432.82,718.19 2432.38,716.77 2432.36,715.74 2430.3,715.75 2382.03,716.14 2342.7,716.5 2210.57,717.72 1925.02,720.31 1326.04,725.79 1324.63,726.22 1323.52,831.85 1312.78,842.87 1054.31,842.87 1054.31,573.35 1922.11,565.39 2207.66,562.76 2341.28,561.53 2380.53,561.18 2429.51,560.75 2437.3,554.72 2442.7,547.56 2446.48,539.41 2448.41,530.63 2448.45,521.65 2446.6,512.87 2442.89,504.68 2437.54,497.48 2430.81,491.53 2422.93,487.16 2415.65,484.96 2420.89,465.24 2430.61,420.04 2435.93,374.02 2436.75,327.68 2433.21,283.03 2507.89,282.36 2512.42,326.97 2522.58,372.28 2538.21,416.06 2557.89,455.51 2481.6,456.18 2480.22,456.61 2480.02,559.21 2480.45,560.59 2566.64,560.94 2581.24,560.79 2726.44,559.45 2742.74,561.06 2758.33,566.06 2779.74,578.46 2793.96,598.46 2794.71,688.42 2795.1,733.07 2795.18,742.91 2795.53,787.09 2795.61,793.94 2796.64,891.06 2761.4,891.06 2601.48,891.3 2600.65,796.5 2600.57,788.9 2600.22,744.72 2600.14,734.88 2599.74,691.34 2597.46,688.86 2591.36,689.53 2584.55,691.93 2578.45,695.83 2573.41,700.94 2569.63,707.09 2567.3,713.9 2566.71,719.96 2565.65,720.31 2564.43,720.98 2563.37,721.85 2562.54,722.95 2561.91,724.21 2562.3,729.57 2563.09,730.71 2564.12,731.65 2565.26,732.4 2566.6,732.87 2567.66,839.57 2567.34,842.91 2566.32,846.02 2564.67,848.9 2562.38,851.3 2559.67,853.19 2556.6,854.41 2553.29,854.96 2551.99,854.96 2489.63,855.43 2488.25,855.83 2487.19,907.52 2467.93,912.99 2447.89,919.76 2411.12,935.31 2376.36,954.33 2299.19,977.32 2215.34,1002.56 2213.72,1004.09 2029.98,1058.9 2008.37,1065.31 1985.69,1072.01 1961.32,1079.25 1887.15,1099.41 1816.67,1115.27 1745.49,1128.07 1665.73,1138.66 1585.57,1145.35 1391.75,1145.08 1317.26,1138.74 1243.09,1128.98 1164.67,1114.72 1094.39,1098.46 1024.82,1079.02 948.68,1053.82 880.97,1027.76 814.59,998.7 751.24,967.6 689.08,933.66 628.37,897.01 575.41,862.01 523.8,825 473.92,786.18 433.09,786.81 396.83,818.5 376.28,836.85 369.31,839.72 355.14,851.26 344.15,860.35 326.99,850.98 325.69,850.39 321.87,849.09 317.89,848.31 313.88,848.03 -312.54,848.03 -316.4,848.27 -320.37,849.02 -324.31,850.31 -325.65,850.91 -342.93,860.43 -353.92,851.3 -367.5,840.12 -374.82,837.05 -395.65,818.5 -430.33,787.48 -471.12,785.67 -497.89,806.14 -537.77,836.14 -579,865.27 -584.19,868.82 -627.14,896.97 -687.85,933.62 -750.02,967.56 -813.33,998.66 -875.22,1025.87 -938.25,1050.43 -1006.63,1073.74 -1083.6,1095.94 -1160.96,1114.17 -1231.67,1127.28 -1310.92,1138.15 -1390.53,1145.04 -1584.39,1145.31 -1626.44,1142.32 -1668.4,1138.23 -1741.04,1128.58 -1813.88,1115.59 -1886,1099.41 -1960.22,1079.21 -1982.89,1072.52 -2005.57,1065.79 -2028.8,1058.9 -2212.42,1004.53 -2297.7,977.4 -2374.98,954.41 -2396.32,942.24 -2418.6,931.26 -2452.22,917.79 -2485.88,907.68 -2485.96,857.91 -2486.4,856.53 -2550.81,854.96 -2551.95,854.96 -2555.26,854.45 -2558.33,853.27 -2561.08,851.42 -2563.37,849.05 -2565.06,846.22 -2566.12,843.11 -2566.51,839.68 -2565.53,732.91 -2563.37,731.97 -2562.3,731.1 -2561.44,730.04 -2560.81,728.82 -2561.87,722.24 -2564,720.55 -2565.29,720.04 -2566.04,714.41 -2568.21,707.6 -2571.87,701.38 -2576.83,696.18 -2582.85,692.2 -2589.63,689.68 -2595.77,688.86 -2597.3,689.17 -2598.96,734.88 -2599.03,744.72 -2599.43,788.9 -2599.47,796.5 -2600.29,891.3 -2758.09,889.96 -2794.4,889.96 -2794.39,787.13 -2794,742.95 -2793.92,733.11 -2793.52,688.42 -2792.77,598.46 -2783.56,585.43 -2771.48,574.41 -2757.34,566.14 -2741.79,561.1 -2725.37,559.49 -2580.06,560.79 -2565.45,560.94 -2481.4,561.69 -2479.98,561.3 -2477.93,458.74 -2556.75,455.51 -2537.14,416.34 -2521.51,372.6 -2511.28,327.28 -2506.75,282.36 -2432.03,283.03 -2435.57,327.4 -2434.78,373.74 -2429.47,419.76 -2419.74,465.12 -2414.47,484.96 -2421.28,486.97 -2429.15,491.22 -2436,497.05 -2441.44,504.21 -2445.26,512.36 -2447.22,521.1 -2447.3,530.08 -2445.45,538.9 -2441.83,547.09 -2436.51,554.33 -2429.98,560.12 -2427.3,560.75 ; -2427.3,560.75 -2427.3,560.75
  lines w7.87: -2781.31,852.91 -2781.07,847.49 -2779.84,842.2 -2777.66,837.23 -2774.61,832.74 -2770.79,828.89 -2766.33,825.8 -2761.39,823.57 -2756.11,822.29 -2750.7,822 -2747.8,822.25 -2744.94,822.79 -2739.8,824.54 -2735.07,827.19 -2730.91,830.67 -2727.45,834.85 -2724.81,839.59 -2723.09,844.73 -2722.33,850.11 -2722.58,855.53 -2723.81,860.81 -2725.98,865.78 -2729.03,870.27 -2732.85,874.13 -2737.31,877.22 -2742.26,879.44 -2747.53,880.72 -2752.95,881.01 -2755.84,880.76 -2758.7,880.22 -2763.84,878.48 -2768.57,875.82 -2772.74,872.35 -2776.2,868.17 -2778.83,863.43 -2780.56,858.28 -2781.31,852.91 ; 2722.35,850.49 2723.03,845.11 2724.69,839.94 2727.26,835.17 2730.66,830.94 2734.78,827.41 2739.48,824.7 2742.18,823.61 2744.97,822.79 2750.34,822.02 2755.76,822.24 2761.05,823.45 2766.03,825.61 2770.53,828.64 2774.39,832.45 2777.5,836.89 2779.74,841.84 2781.04,847.1 2781.35,852.52 2780.67,857.9 2779.02,863.07 2776.44,867.85 2773.04,872.07 2768.92,875.6 2764.22,878.32 2761.52,879.41 2758.73,880.22 2753.36,881 2747.94,880.77 2742.65,879.56 2737.67,877.41 2733.18,874.37 2729.31,870.57 2726.2,866.12 2723.96,861.18 2722.66,855.91 2722.35,850.49

## Silkscreen, mask and mechanical layers (free items; w line width, h text height)
Top Overlay:
  rectangle: -32.75,735.75 64.68,757.04
  rectangle: -34,786.24 65.03,809.79
  rectangle: -34,685.81 67.21,707.01
  rectangle: -34,685.81 -10.11,809.79
  rectangle: -84.35,830.51 64.68,851.71
  rectangle: -84.35,684.93 -57.97,851.71
  text "FRONT FLEX  v3 / 04.16.2021" at -1659.29,1044.6 h23.62
  text "PATRICK CHWALEK & DAVID RAMSAY" at 989.07,1033.76 h33.46
Bottom Overlay:
  text "BLINK_CATHODE" at -251.16,791.46 h20 r45
  text "BLINK_SIG" at -350.15,777.31 h20 r45
  text "GND" at -463.29,749.03 h20 r45
  text "GND" at 502,706.98 h20 r305
  text "BLINK_PWM" at -273.72,700.89 h20 r45
  text "TP_NOSE" at 471.08,661.7 h20 r305
  text "TP_NOSE_GND" at 432.82,609.14 h20 r305
  text "TP_THERMISTOR" at 400.95,563.29 h20 r305
Stiffener:
  lines w3.94: -2567.44,559.11 -2481.94,560.37 -2481.02,459.89 ; -1325.7,729.49 -1325.7,569.86 -1052.14,572.1 ; 1052.2,572.03 1325.48,569.53 ; 2480.29,460.31 2481.21,560.79 2566.7,559.53
  lines w4: -2798.16,679.58 -2598.8,681.4 ; -2797.97,679.59 -2797.28,598.67 -2797.1,598.1 -2787.45,584.48 -2775,573.06 -2760.38,564.54 -2744.3,559.33 -2727.48,557.65 -2582.04,558.98 -2567.44,559.11 ; -2598.16,681.41 -2430.23,682.94 -2429.18,559.11 ; -2481.02,459.89 -2559.76,459.17 -2560.47,458.91 -2560.76,457.95 -2539.96,416.39 -2524.45,372.92 -2514.31,327.89 -2509.67,281.91 -2509.49,281.39 -2508.86,281.01 -2430.94,281.72 -2430.36,281.91 -2429.95,282.6 -2433.63,328.8 -2432.82,374.89 -2427.55,420.68 -2417.87,465.77 -2412.2,487.19 -2412.5,487.92 -2421.13,490.56 -2428.54,494.61 -2434.93,500.14 -2440,506.9 -2443.52,514.58 -2445.33,522.83 -2445.35,531.28 -2443.58,539.54 -2440.09,547.24 -2435.05,554.02 -2428.88,559.4 ; -1325.7,729.49 -1325.7,834.02 -1325.4,834.62 -1313.69,846.33 -1313.06,846.55 -1053.02,846.78 -1052.42,846.94 -1051.83,846.74 -1051.43,845.94 -1051.43,572.83 -1051.86,572.18 ; -576.21,134.32 -614.99,127.77 -618.48,127.48 -622.04,127.8 -625.68,128.79 -629.07,130.42 -632.12,132.65 -634.71,135.39 -638.33,139.79 -657.91,252.71 -656.74,255.66 -655.95,259.32 -654.5,262.81 -652.44,265.97 -649.85,268.7 -646.79,270.92 -643.39,272.54 -639.75,273.53 -467.2,302.71 ; 1052,572.03 1051.36,572.46 1051.21,573.03 1051.21,846.26 1051.58,846.78 1052.19,846.99 1053,846.55 1312.95,846.55 1313.55,846.26 1325.44,834.21 1325.53,833.61 1325.48,833.09 1325.48,569.53 ; 2428.15,559.82 2434.31,554.44 2439.36,547.66 2442.84,539.96 2444.62,531.7 2444.6,523.25 2442.79,515 2439.27,507.32 2434.2,500.56 2427.81,495.03 2420.39,490.98 2411.76,488.34 2411.47,487.61 2417.13,466.19 2426.82,421.1 2432.09,375.31 2432.89,329.22 2429.21,283.02 2429.63,282.33 2430.21,282.14 2508.12,281.43 2508.75,281.81 2508.94,282.33 2513.57,328.31 2523.72,373.34 2539.23,416.81 2560.02,458.37 2559.73,459.33 2559.02,459.59 2480.29,460.31 ; 2428.44,559.53 2429.49,683.36 2597.42,681.83 ; 2566.7,559.53 2581.31,559.4 2726.75,558.07 2743.57,559.75 2759.65,564.96 2774.26,573.48 2786.72,584.9 2796.37,598.52 2796.55,599.09 2797.24,680.01 ; 2598.06,681.82 2797.42,680
  lines w4.02: -576.21,134.32 -441.25,154.43 -467.2,302.71
Board Outline:
  drawing of 641 lines, arcs and shapes, not listed